# Altium PCB 矿用数显表20121017.PcbDoc (part 2 of 2)
Units mil, origin at the board's own origin, x right, y up, seen from the top; angles counter-clockwise.
Board outline 6550 x 5130 mil, 2 copper layers (Top Layer, Bottom Layer); 91 components, 70 nets, 283 pads, 64 vias.
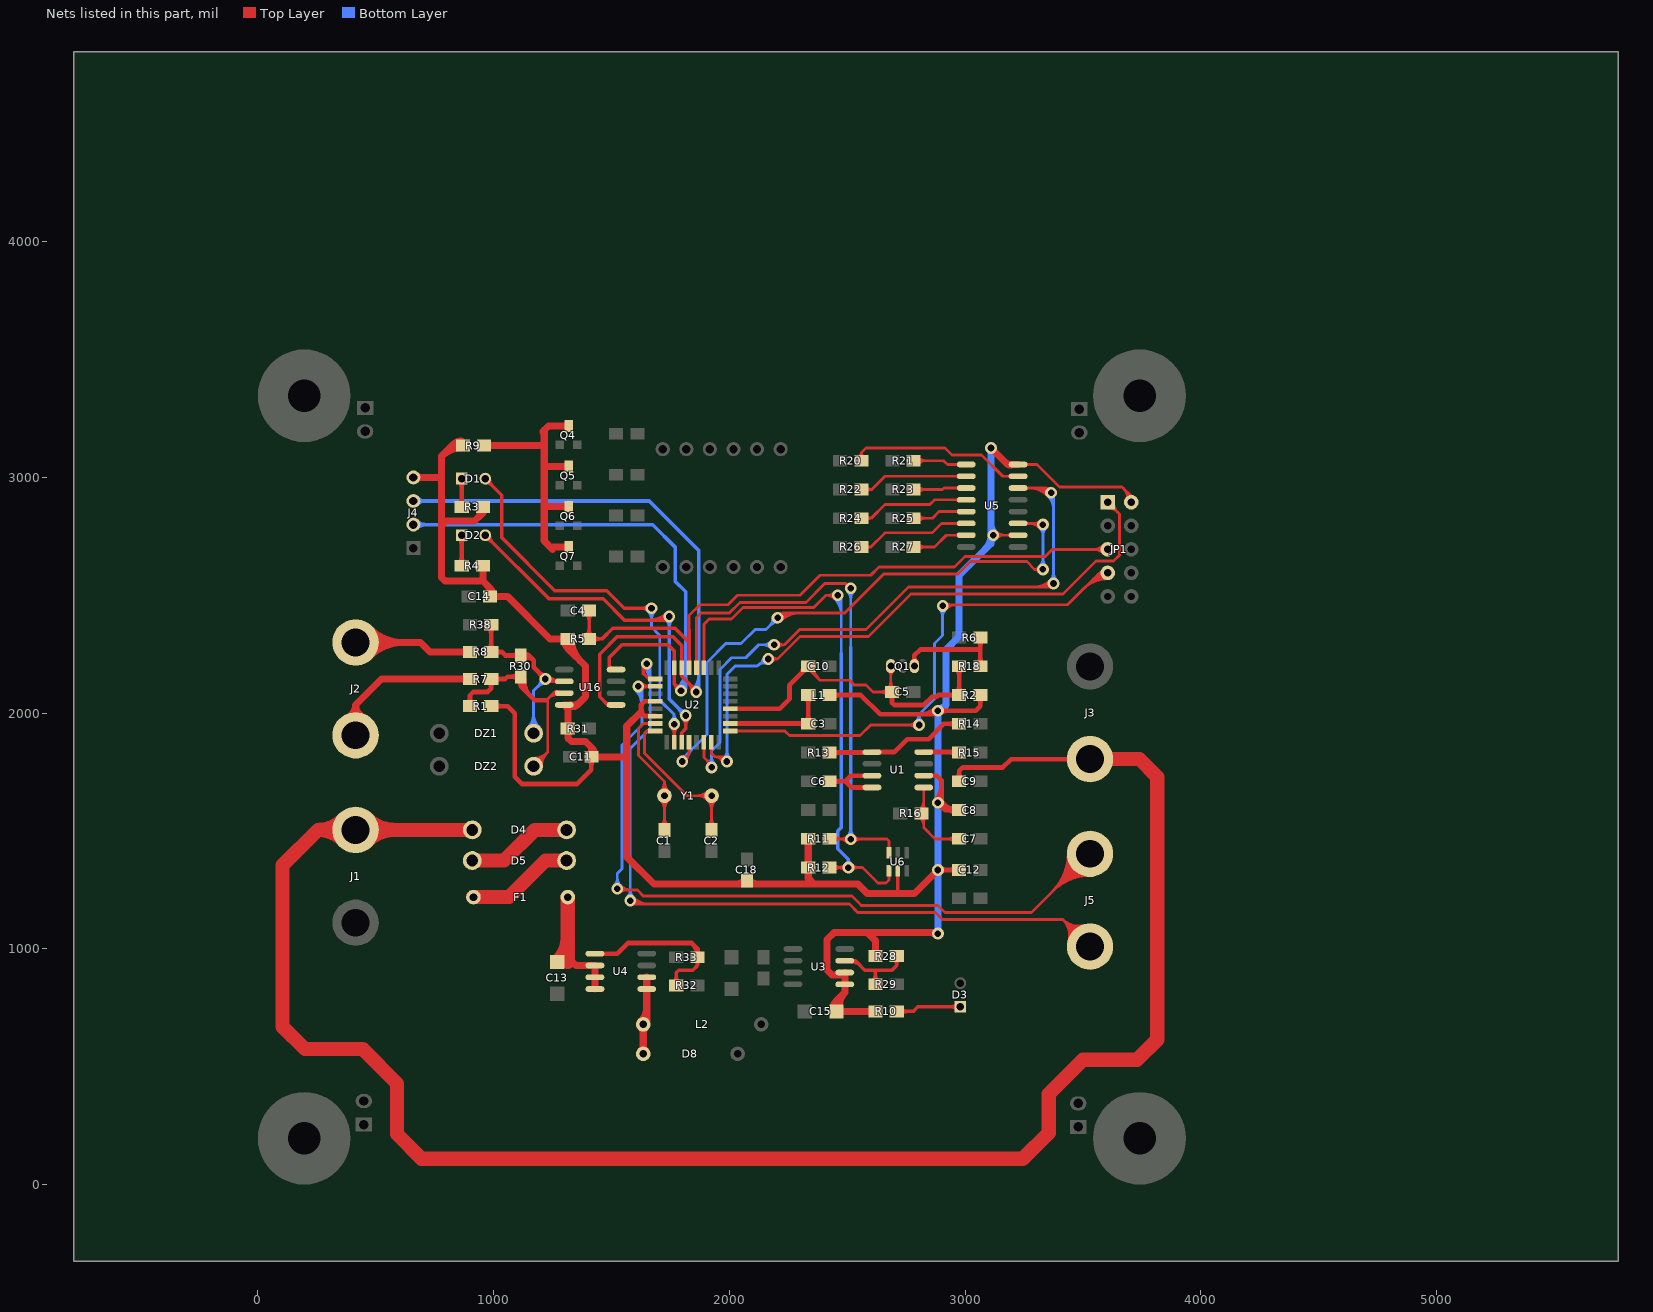
[diagram p2: the nets of this part, all layers, seen from the top]

## Via types
v1: diameter 50, hole 28, Top Layer to Bottom Layer, 64 vias

## Nets (pads, with @x,y where several pads share a name; then routed paths per layer and width w, separated by ;. In a path a pad name is that pad's centre, name@x,y a point inside that pad or via, vN(x,y) a via of type N, cw(c..) or ccw(c..) an arc to the next point about the centre after c; other vN are vias at no path point) (continued)
MOSI: JP1.1 U2.15 | length 3099.7
  Top Layer w12: U2.15@1923.74,1876.54 1923.74,1831.26 1940,1815 ; 1955.39,1815 cw(c1955.39,1786.31) v1@1983.21,1793.3 ; 1970.77,1815 cw(c1970.77,1790.17) v1@1994.85,1796.22 ; v1@1971.57,1790.37 ccw(c1940,1782.45) 1940,1815 ; v1@1972.48,1802.36 ccw(c1961.83,1806.83) 1970,1815 ; v1@1982.64,1812.52 cw(c1978.17,1823.17) 1970,1815 ; v1(1990,1795) 1970,1815 ; v1(2165,2230) 2205,2230 ; v1@2179.73,2218 cw(c2205,2197.4) 2205,2230 ; v1@2179.73,2242 ccw(c2205,2262.6) 2205,2230 ; JP1.1@3605,2870 cw(c3605,2809.64) 3647.68,2852.32 cw(c3690.36,2895) JP1.1@3630,2895 ; JP1.1@3605,2882 cw(c3605,2850.62) 3627.19,2872.81 cw(c3649.38,2895) JP1.1@3618,2895 ; JP1.1@3605,2895 3655,2845 3655,2670 3630,2645 3555,2645 3415,2505 2770,2505 2590,2325 2300,2325 2205,2230 ; 1940,1815 1970,1815
  Bottom Layer w12: v1@1976.56,1808.44 ccw(c1944.13,1840.87) 1990,1840.87 ccw(c2035.87,1840.87) v1@2003.44,1808.44 ; v1(1990,1795) 1990,2165 2025,2200 2115,2200 v1(2165,2230) ; v1@2146.57,2234.61 cw(c2102.07,2245.73) 2125.67,2206.4 cw(c2149.27,2167.07) v1@2160.39,2211.57
NetC1_2: C1.2 U2.7 Y1.2 | length 914.9
  Top Layer w12: U2.7@1686.54,1956.26 1636.26,1956.26 1615,1935 1615,1820 1725,1710 ; Y1.2@1707.32,1632.32 cw(c1664.64,1589.64) 1725,1589.64 cw(c1785.36,1589.64) Y1.2@1742.68,1632.32 ; Y1.2@1707.4,1667.75 ccw(c1665.51,1710) 1725,1710 ; C1.2@1711.56,1523.44 ccw(c1679.13,1555.87) 1725,1555.87 ccw(c1770.87,1555.87) C1.2@1738.44,1523.44 ; Y1.2@1715.81,1640.81 cw(c1693.62,1618.62) 1725,1618.62 cw(c1756.38,1618.62) Y1.2@1734.19,1640.81 ; Y1.2@1715.85,1659.23 ccw(c1694.06,1681.2) 1725,1681.2 ccw(c1755.94,1681.2) Y1.2@1734.15,1659.23 ; C1.2@1725,1505 Y1.2@1725,1650 1725,1710 ; Y1.2@1742.6,1667.75 cw(c1784.49,1710) 1725,1710
NetC2_2: C2.2 U2.8 Y1.1 | length 1000.4
  Top Layer w12: U2.8@1686.54,1924.76 1649.76,1924.76 1640,1915 1640,1830 1820,1650 Y1.1@1925,1650 C2.2@1925,1505 ; Y1.1@1907.32,1667.68 cw(c1864.64,1710.36) 1864.64,1650 cw(c1864.64,1589.64) 1907.32,1632.32 cw(c1864.64,1589.64) 1925,1589.64 cw(c1985.36,1589.64) Y1.1@1942.68,1632.32 ; C2.2@1911.56,1523.44 ccw(c1879.13,1555.87) 1925,1555.87 ccw(c1970.87,1555.87) C2.2@1938.44,1523.44 ; Y1.1@1915.81,1659.19 cw(c1893.62,1681.38) 1893.62,1650 cw(c1893.62,1618.62) 1915.81,1640.81 cw(c1893.62,1618.62) 1925,1618.62 cw(c1956.38,1618.62) Y1.1@1934.19,1640.81
NetC3_1: C3.1 L1.1 U2.18 | length 622.2
  Top Layer w20: U2.18@2003.46,1956.26 2333.74,1956.26 2335,1957.52 L1.1@2335,2077 ; 2290.74,1956.26 cw(c2290.74,1915.74) C3.1@2319.39,1944.39 ; 2296.83,1956.26 ccw(c2296.83,1988.17) C3.1@2319.39,1965.61 ; C3.1@2324.39,1965.61 ccw(c2298.79,1991.21) 2335,1991.21 ccw(c2371.21,1991.21) C3.1@2345.61,1965.61 ; L1.1@2324.39,2066.39 cw(c2298.79,2040.79) 2335,2040.79 cw(c2371.21,2040.79) L1.1@2345.61,2066.39
NetC5_1: C5.1 C10.1 Q1.3 R2.1 R18.1 U2.20 | length 2005.2
  Top Layer w12: C10.1@2335,2199 2335,2190 2385,2140 2510,2140 2530,2120 2580,2120 2610,2090 C5.1@2690,2090 2685,2095 Q1.3@2685,2200 ; C10.1@2346.98,2198.53 ccw(c2389.31,2195.68) 2359.31,2165.69 ; C10.1@2358.96,2197.72 ccw(c2424.32,2193.33) 2378,2147 ; C5.1@2671.56,2076.56 ccw(c2639.13,2044.13) 2639.13,2090 ccw(c2639.13,2135.87) 2671.56,2103.44 ccw(c2639.13,2135.87) 2685,2135.87 ccw(c2730.87,2135.87) C5.1@2698.44,2103.44 ; Q1.3@2675.1,2180.1 cw(c2651.2,2156.2) 2685,2156.2 cw(c2718.8,2156.2) Q1.3@2694.9,2180.1
  Top Layer w20: U2.20@2003.46,2019.25 2214.25,2019.25 2255,2060 2255,2119 C10.1@2335,2199 ; 2300.86,2164.86 ccw(c2266.72,2199) C10.1@2315,2199 ; C10.1@2312.93,2176.93 cw(c2330,2159.86) C10.1@2330,2184 ; C5.1@2679.39,2079.39 cw(c2653.79,2053.79) 2690,2053.79 cw(c2726.21,2053.79) C5.1@2700.61,2079.39 ; C5.1@2690,2090 2690,2045 2700,2035 2825,2035 2860,2070 2880,2070 2887,2077 R2.1@2975,2077 R18.1@2975,2199 ; R2.1@2959.39,2066.39 ccw(c2933.79,2040.79) 2933.79,2077 ccw(c2933.79,2113.21) R2.1@2959.39,2087.61 ; R2.1@2964.39,2087.61 ccw(c2938.79,2113.21) 2975,2113.21 ccw(c3011.21,2113.21) R2.1@2985.61,2087.61 ; R18.1@2964.39,2188.39 cw(c2938.79,2162.79) 2975,2162.79 cw(c3011.21,2162.79) R18.1@2985.61,2188.39
NetC6_1: C6.1 U1.3 U1.4 | length 371.6
  Top Layer w20: C6.1@2425,1711 2491,1711 ; C6.1@2440.61,1700.39 cw(c2466.21,1674.79) 2466.21,1711 cw(c2466.21,1747.21) C6.1@2440.61,1721.61 ; U1.4@2605,1685 2517,1685 2491,1711 ; U1.3@2605,1735 2515,1735 2491,1711
NetC13_1: C13.1 F1.1 U4.2 U4.3 U4.4 | length 794.3
  Top Layer w30: 1315,945 1335,945 1350,930 U4.2@1430,930 U4.4@1430,830 ; 1306.21,945 ccw(c1306.21,908.79) 1280.61,934.39 cw(c1306.21,908.79) 1306.21,945 ; 1306.21,945 cw(c1306.21,981.21) 1280.61,955.61 ccw(c1306.21,981.21) 1306.21,945
  Top Layer w60: 1315,945 F1.1@1315,1220 ; 1315,990 C13.1@1270,945 ccw(c1161.36,1053.64) 1315,1053.64
NetD1_1: D1.1 R3.1 | length 233.8
  Top Layer w20: R3.1@854.39,2885.61 ccw(c828.79,2911.21) 865,2911.21 ccw(c901.21,2911.21) R3.1@875.61,2885.61 ; D1.1@854.39,2984.39 cw(c828.79,2958.79) 865,2958.79 cw(c901.21,2958.79) D1.1@875.61,2984.39 ; R3.1@865,2875 D1.1@865,2995
NetD1_2: D1.2 U2.10 | length 1975.6
  Top Layer w15: D1.2@965,2977.5 cw(c965,2935.25) 994.87,2965.13 cw(c1024.75,2995) D1.2@982.5,2995 ; D1.2@965,2995 1035,2925 1035,2745 1260,2520 1480,2520 1555,2445 v1(1670,2445) ; v1@1657.63,2432.63 ccw(c1627.75,2402.75) 1627.75,2445 ccw(c1627.75,2487.25) v1@1657.63,2457.37 ; v1@1753.89,1941.37 cw(c1724.01,1911.49) 1766.26,1911.49 cw(c1808.51,1911.49) v1@1778.63,1941.37 ; U2.10@1766.26,1876.54 v1(1766.26,1953.74)
  Bottom Layer w12: v1@1656.56,2431.56 cw(c1624.13,2399.13) 1670,2399.13 cw(c1715.87,2399.13) v1@1683.44,2431.56 ; v1(1670,2445) 1670,2365 1705,2330 1705,2055 1766.26,1993.74 ; v1@1754.26,1968.47 ccw(c1733.66,1993.74) 1766.26,1993.74 ; v1(1766.26,1953.74) 1766.26,1993.74 ; v1@1778.26,1968.47 cw(c1798.86,1993.74) 1766.26,1993.74
NetD2_1: D2.1 R4.1 | length 243.8
  Top Layer w20: R4.1@854.39,2635.61 ccw(c828.79,2661.21) 865,2661.21 ccw(c901.21,2661.21) R4.1@875.61,2635.61 ; D2.1@854.39,2744.39 cw(c828.79,2718.79) 865,2718.79 cw(c901.21,2718.79) D2.1@875.61,2744.39 ; R4.1@865,2625 D2.1@865,2755
NetD2_2: D2.2 U2.11 | length 1888.8
  Top Layer w15: D2.2@965,2737.5 cw(c965,2695.25) 994.87,2725.13 cw(c1024.75,2755) D2.2@982.5,2755 ; D2.2@965,2755 1235,2485 1465,2485 1555,2395 1730,2395 v1(1745,2410) ; 1666.54,2395 ccw(c1666.54,2488.46) v1@1732.63,2422.37 ; 1702.75,2395 ccw(c1702.75,2452.25) v1@1743.23,2411.77 ; U2.11@1797.76,1876.54 1797.76,1917.76 1815,1935 v1(1815,1990) ; v1@1802.63,1977.63 cw(c1772.75,1947.75) 1815,1947.75 cw(c1857.25,1947.75) v1@1827.37,1977.63
  Bottom Layer w15: v1@1732.63,2397.63 cw(c1702.75,2367.75) 1745,2367.75 cw(c1787.25,2367.75) v1@1757.37,2397.63 ; v1(1745,2410) 1745,2060 v1(1815,1990) ; v1@1797.5,1990 ccw(c1755.25,1990) 1785.13,2019.87 ccw(c1815,2049.75) v1@1815,2007.5
NetD3_1: D3.1 R10.1 | length 411
  Top Layer w15: R10.1@2710,735 2780,735 2800,755 D3.1@2980,755 ; R10.1@2727.37,722.63 cw(c2757.25,692.75) 2757.25,735 cw(c2757.25,777.25) R10.1@2727.37,747.37 ; D3.1@2967.63,742.63 ccw(c2937.75,712.75) 2937.75,755 ccw(c2937.75,797.25) D3.1@2967.63,767.37
NetD4_2: D4.2 D5.1 | length 453.8
  Top Layer w60: D5.1@910,1375 1045,1375 1175,1505 D4.2@1310,1505
NetD5_2: D5.2 F1.2 | length 459.2
  Top Layer w60: F1.2@915,1220 1065,1220 1220,1375 D5.2@1310,1375
NetD8_2: D8.2 L2.1 U4.5 U4.6 | length 523.1
  Top Layer w30: D8.2@1623.69,566.31 ccw(c1596.37,593.63) 1635,593.63 ccw(c1673.63,593.63) D8.2@1646.31,566.31 ; L2.1@1623.69,668.69 cw(c1596.37,641.37) 1635,641.37 cw(c1673.63,641.37) L2.1@1646.31,668.69 ; L2.1@1623.69,691.31 ccw(c1560.16,754.84) 1650,754.84 ; D8.2@1635,555 L2.1@1635,680 1650,695 U4.6@1650,880
NetDZ1_2: DZ1.2 R8.2 R30.2 R38.2 U16.6 | length 1726.2
  Top Layer w12: v1@1201.38,2148.79 ccw(c1178.46,2153.46) 1195,2170 ; v1@1216.21,2163.62 cw(c1211.54,2186.54) 1195,2170 ; v1@1224.95,2149.95 ccw(c1261.04,2186.04) U16.6@1261.04,2135 ; v1@1233.44,2158.44 ccw(c1290.01,2215.01) U16.6@1290.01,2135 ; U16.6@1267.76,2130.76 ccw(c1257.51,2120.51) 1257.51,2135 ccw(c1257.51,2149.49) U16.6@1267.76,2139.24 ; U16.6@1300,2135 1230,2135 1195,2170
  Top Layer w20: R8.2@979.39,2270.61 ccw(c953.79,2296.21) 990,2296.21 ccw(c1026.21,2296.21) R8.2@1000.61,2270.61 ; R38.2@979.39,2364.39 cw(c953.79,2338.79) 990,2338.79 cw(c1026.21,2338.79) R38.2@1000.61,2364.39 ; R38.2@990,2375 R8.2@990,2260 1035,2260 1050,2245 1150,2245 ; R8.2@1005.61,2249.39 cw(c1031.21,2223.79) 1031.21,2260 cw(c1031.21,2296.21) R8.2@1005.61,2270.61 ; R30.2@1104.39,2234.39 ccw(c1078.79,2208.79) 1078.79,2245 ccw(c1078.79,2281.21) R30.2@1104.39,2255.61 ; R30.2@1111.97,2243.98 cw(c1131.29,2218.64) 1153.83,2241.17 ; R30.2@1113.86,2244.87 cw(c1126.24,2192.06) 1164.59,2230.41 ; R30.2@1124.1,2228.07 cw(c1145.29,2200.29) 1170,2225 ; R30.2@1125.86,2234.66 cw(c1150,2211.67) 1150,2245 ; R30.2@1125.86,2255.34 ccw(c1150,2278.33) 1150,2245 ; v1@1205,2145 ccw(c1168.79,2145) 1194.39,2170.61 ccw(c1220,2196.21) v1@1220,2160 ; v1(1220,2145) 1170,2195 1170,2225 ; 1150,2245 1170,2225
  Bottom Layer w12: DZ1.2@1145.96,1939.04 ccw(c1087.92,1997.08) 1170,1997.08 ccw(c1252.08,1997.08) DZ1.2@1194.04,1939.04 ; DZ1.2@1154.44,1930.56 ccw(c1116.89,1968.11) 1170,1968.11 ccw(c1223.11,1968.11) DZ1.2@1185.56,1930.56 ; DZ1.2@1170,1915 1170,2095 v1(1220,2145) ; v1@1201,2145 cw(c1155.13,2145) 1187.56,2112.56 cw(c1220,2080.13) v1@1220,2126
NetDZ2_2: DZ2.2 R1.1 R7.2 R30.1 U16.7 | length 1702.8
  Top Layer w12: DZ2.2@1170,1775 1230,1835 1230,2060 ; DZ2.2@1170,1797 ccw(c1170,1850.11) 1207.56,1812.56 ccw(c1245.11,1775) DZ2.2@1192,1775 ; DZ2.2@1170,1809 ccw(c1170,1891.08) 1228.04,1833.04 ccw(c1286.08,1775) DZ2.2@1204,1775 ; 1225,2055 1255,2085 U16.7@1300,2085 ; 1232.74,2062.74 cw(c1272,2023.47) U16.7@1272,2079 ; 1246.5,2076.5 cw(c1259.97,2063.03) U16.7@1269.12,2079.74 ; 1253.22,2083.22 cw(c1272,2064.44) U16.7@1272,2091 ; 1257.82,2087.82 cw(c1267.98,2077.66) U16.7@1274.88,2090.26 ; U16.7@1267.76,2080.76 ccw(c1257.51,2070.51) 1257.51,2085 ccw(c1257.51,2099.49) U16.7@1267.76,2089.24
  Top Layer w20: R1.1@889.39,2040.61 ccw(c863.79,2066.21) 900,2066.21 ccw(c936.21,2066.21) R1.1@910.61,2040.61 ; R1.1@900,2030 900,2075 915,2090 975,2090 990,2105 R7.2@990,2145 1050,2145 1060,2155 R30.1@1115,2155 1115,2115 ; R7.2@979.39,2134.39 cw(c953.79,2108.79) 990,2108.79 cw(c1026.21,2108.79) R7.2@1000.61,2134.39 ; R7.2@1005.61,2134.39 cw(c1031.21,2108.79) 1031.21,2145 cw(c1031.21,2181.21) R7.2@1005.61,2155.61 ; R30.1@1104.39,2144.39 ccw(c1078.79,2118.79) 1078.79,2155 ccw(c1078.79,2191.21) R30.1@1104.39,2165.61 ; R30.1@1110.02,2150.45 ccw(c1169.64,2145.02) 1127.31,2102.69 ; R30.1@1129.94,2148.64 ccw(c1224.98,2139.99) 1157.5,2072.5 ; 1225,2055 1175,2055 1115,2115 ; 1115,2115 ccw(c1081.67,2115) 1104.66,2139.14 cw(c1081.67,2115) 1115,2115 ; 1115,2115 cw(c1148.33,2115) 1125.34,2139.14 ccw(c1148.33,2115) 1115,2115
NetQ1_1: Q1.1 R6.2 R18.2 | length 609
  Top Layer w20: Q1.1@2777.93,2217.07 ccw(c2760.86,2234.14) 2785,2234.14 ccw(c2809.14,2234.14) Q1.1@2792.07,2217.07 ; Q1.1@2785,2200 2785,2245 2810,2270 3065,2270 ; R18.2@3054.39,2209.61 ccw(c3028.79,2235.21) 3065,2235.21 ccw(c3101.21,2235.21) R18.2@3075.61,2209.61 ; R6.2@3054.39,2310.39 cw(c3028.79,2284.79) 3065,2284.79 cw(c3101.21,2284.79) R6.2@3075.61,2310.39 ; R18.2@3065,2199 R6.2@3065,2321
NetQ4_3: Q4.3 Q5.3 Q6.3 Q7.3 R9.2 | length 1184.3
  Top Layer w30: R9.2@960,3135 1215,3135 ; 1210,3190 1210,3195 1233,3218 Q4.3@1318,3218 ; 1215,2882 1221,2876 Q6.3@1318,2876 ; 1215,3045 1217,3047 Q5.3@1318,3047 ; 1215,3200 1215,2730 1250,2695 ; 1240,2705 Q7.3@1318,2705
NetR13_2: R13.2 R14.1 U1.1 | length 711.5
  Top Layer w20: R13.2@2425,1833 U1.1@2603,1833 ; R13.2@2440.61,1822.39 cw(c2466.21,1796.79) 2466.21,1833 cw(c2466.21,1869.21) R13.2@2440.61,1843.61 ; U1.1@2605,1835 2700,1835 2755,1890 2845,1890 2910,1955 R14.1@2975,1955 ; R14.1@2959.39,1944.39 ccw(c2933.79,1918.79) 2933.79,1955 ccw(c2933.79,1991.21) R14.1@2959.39,1965.61
NetR15_1: R15.1 U1.8 | length 207.7
  Top Layer w20: U1.8@2825,1835 2973,1835 R15.1@2975,1833 ; 2928.96,1835 cw(c2928.96,1791.96) R15.1@2959.39,1822.39 ; 2938.62,1835 ccw(c2938.62,1864.38) R15.1@2959.39,1843.61
NetR20_1: R20.1 U5.15 | length 822.4
  Top Layer w12: R20.1@2550.04,3087.18 ccw(c2539.08,3105) 2560,3105 ; R20.1@2560,3071 2560,3105 ; R20.1@2569.96,3087.18 cw(c2580.92,3105) 2560,3105 ; U5.15@3192.76,3000.76 ccw(c3182.51,2990.51) 3182.51,3005 ccw(c3182.51,3019.49) U5.15@3192.76,3009.24 ; U5.15@3225,3005 3160,3005 3070,3095 2945,3095 2915,3125 2580,3125 2560,3105
NetR21_1: R21.1 U5.1 | length 324.4
  Top Layer w12: R21.1@2782,3071 2909,3071 2925,3055 U5.1@3005,3055 ; R21.1@2800.44,3057.56 cw(c2832.87,3025.13) 2832.87,3071 cw(c2832.87,3116.87) R21.1@2800.44,3084.44 ; U5.1@2972.76,3050.76 ccw(c2962.51,3040.51) 2962.51,3055 ccw(c2962.51,3069.49) U5.1@2972.76,3059.24
NetR22_1: R22.1 U5.2 | length 546.3
  Top Layer w12: R22.1@2560,2949 2604,2949 ; R22.1@2579.96,2937.29 cw(c2604,2918.48) 2604,2949 ; R22.1@2579.96,2960.71 ccw(c2604,2979.52) 2604,2949 ; U5.2@2972.76,3000.76 ccw(c2962.51,2990.51) 2962.51,3005 ccw(c2962.51,3019.49) U5.2@2972.76,3009.24 ; U5.2@3005,3005 2660,3005 2604,2949
NetR23_1: R23.1 U5.3 | length 320.3
  Top Layer w12: R23.1@2782,2949 2904,2949 2910,2955 U5.3@3005,2955 ; R23.1@2800.44,2935.56 cw(c2832.87,2903.13) 2832.87,2949 cw(c2832.87,2994.87) R23.1@2800.44,2962.44 ; U5.3@2972.76,2950.76 ccw(c2962.51,2940.51) 2962.51,2955 ccw(c2962.51,2969.49) U5.3@2972.76,2959.24
NetR24_1: R24.1 U5.4 | length 550.4
  Top Layer w12: R24.1@2560,2827 2602,2827 ; R24.1@2580.44,2815.93 cw(c2602,2800.48) 2602,2827 ; R24.1@2580.44,2838.07 ccw(c2602,2853.52) 2602,2827 ; U5.4@2972.76,2900.76 ccw(c2962.51,2890.51) 2962.51,2905 ccw(c2962.51,2919.49) U5.4@2972.76,2909.24 ; U5.4@3005,2905 2870,2905 2850,2885 2660,2885 2602,2827
NetR25_1: R25.1 U5.5 | length 329.4
  Top Layer w12: R25.1@2782,2827 2862,2827 2890,2855 U5.5@3005,2855 ; R25.1@2800.44,2813.56 cw(c2832.87,2781.13) 2832.87,2827 cw(c2832.87,2872.87) R25.1@2800.44,2840.44 ; U5.5@2972.76,2850.76 ccw(c2962.51,2840.51) 2962.51,2855 ccw(c2962.51,2869.49) U5.5@2972.76,2859.24
NetR26_1: R26.1 U5.6 | length 554.4
  Top Layer w12: R26.1@2560,2705 2600,2705 ; R26.1@2580.93,2694.65 cw(c2600,2682.27) 2600,2705 ; R26.1@2580.93,2715.35 ccw(c2600,2727.73) 2600,2705 ; U5.6@2972.76,2800.76 ccw(c2962.51,2790.51) 2962.51,2805 ccw(c2962.51,2819.49) U5.6@2972.76,2809.24 ; U5.6@3005,2805 2900,2805 2860,2765 2660,2765 2600,2705
NetR27_1: R27.1 U5.7 | length 338.5
  Top Layer w12: R27.1@2782,2705 2870,2705 2920,2755 U5.7@3005,2755 ; R27.1@2800.44,2691.56 cw(c2832.87,2659.13) 2832.87,2705 cw(c2832.87,2750.87) R27.1@2800.44,2718.44 ; U5.7@2972.76,2750.76 ccw(c2962.51,2740.51) 2962.51,2755 ccw(c2962.51,2769.49) U5.7@2972.76,2759.24
NetR28_1: R28.1 R29.1 U3.7 | length 538.5
  Top Layer w15: U3.7@2490,950 2535,950 2575,910 2690,910 2710,930 ; U3.7@2518,945.5 cw(c2518,893.59) 2554.7,930.3 ; U3.7@2519.83,945.89 cw(c2528.47,926.47) 2543.5,941.5 ; R29.1@2607.63,862.37 ccw(c2577.75,892.25) 2620,892.25 ccw(c2662.25,892.25) R29.1@2632.37,862.37 ; R29.1@2620,850 2620,910 ; R28.1@2698.12,957.15 cw(c2673.04,930) 2710,930 ; R28.1@2710,970 2710,930 ; R28.1@2721.88,957.15 ccw(c2746.96,930) 2710,930
NetR32_1: R32.1 R33.2 U4.1 | length 918.4
  Top Layer w15: R32.1@1762.63,857.37 ccw(c1732.75,887.25) 1775,887.25 ccw(c1817.25,887.25) R32.1@1787.37,857.37 ; R32.1@1775,845 1775,900 1785,910 1845,910 1865,930 ; R33.2@1854.5,951 cw(c1838.75,930) 1865,930 ; R33.2@1865,965 1865,930 ; R33.2@1875.5,951 ccw(c1891.25,930) 1865,930
  Top Layer w20: U4.1@1430,980 1525,980 1570,1025 1840,1025 1865,1000 ; 1847.72,1017.27 cw(c1804.32,973.87) R33.2@1864.94,964.21 ; R33.2@1854.66,975.86 ccw(c1831.67,1000) 1865,1000 ; R33.2@1865,965 1865,1000 ; R33.2@1875.34,975.86 cw(c1898.33,1000) 1865,1000
OUT0-5V: C7.1 R16.2 U1.5 | length 632.2
  Top Layer w12: R16.2@2806.56,1561.56 cw(c2762.06,1517.06) 2825,1517.06 ; R16.2@2806.56,1588.44 ccw(c2762.06,1632.94) 2825,1632.94 ; R16.2@2815.05,1570.05 cw(c2791.03,1546.03) 2825,1546.03 ; R16.2@2815.05,1579.95 ccw(c2791.03,1603.97) 2825,1603.97 ; U1.5@2820.76,1680.76 cw(c2810.51,1670.51) 2825,1670.51 cw(c2839.49,1670.51) U1.5@2829.24,1680.76 ; 2825,1541.2 cw(c2853.8,1541.2) R16.2@2833.44,1561.56 ; 2825,1608.8 ccw(c2853.8,1608.8) R16.2@2833.44,1588.44 ; U1.5@2825,1685 2825,1515 2873,1467 C7.1@2975,1467 ; C7.1@2956.56,1453.56 ccw(c2924.13,1421.13) 2924.13,1467 ccw(c2924.13,1512.87) C7.1@2956.56,1480.44
RST: C4.1 JP1.5 R5.1 U2.29 | length 3043.5
  Top Layer w12: 1829.25,2354.25 1829.25,2414.25 1875,2460 1995,2460 2035,2500 2300,2500 2385,2585 2600,2585 2635,2620 2955,2620 3000,2665 3340,2665 3370,2695 JP1.5@3605,2695 ; JP1.5@3587.32,2677.32 ccw(c3544.64,2634.64) 3544.64,2695 ccw(c3544.64,2755.36) JP1.5@3587.32,2712.68 ; JP1.5@3595.81,2685.81 ccw(c3573.62,2663.62) 3573.62,2695 ccw(c3573.62,2726.38) JP1.5@3595.81,2704.19
  Top Layer w15: R5.1@1392.63,2327.37 ccw(c1362.75,2357.25) 1405,2357.25 ccw(c1447.25,2357.25) R5.1@1417.37,2327.37 ; C4.1@1392.63,2422.63 cw(c1362.75,2392.75) 1405,2392.75 cw(c1447.25,2392.75) C4.1@1417.37,2422.63 ; C4.1@1405,2435 R5.1@1405,2315 1460,2315 1505,2360 1770,2360 1829.25,2300.75 ; R5.1@1422.37,2302.63 cw(c1452.25,2272.75) 1452.25,2315 cw(c1452.25,2357.25) R5.1@1422.37,2327.37 ; U2.29@1829.25,2193.46 1829.25,2354.25
RXD: J4.3 U2.30 U16.1 | length 3046.4
  Top Layer w15: 1472.37,2047.63 ccw(c1492,2067.26) U16.1@1492,2039.5 ; U16.1@1520,2035 1485,2035 1450,2070 1450,2250 1525,2325 1760,2325 1797.76,2287.24 1797.76,2157.24 1860,2095 v1(1860,2090) ; 1826.59,2128.41 cw(c1788.18,2090) v1@1842.5,2090 ; 1838.66,2116.34 ccw(c1860,2137.68) v1@1860,2107.5
  Bottom Layer w15: J4.3@660,2900 1660,2900 1870,2690 1870,2100 v1(1860,2090) ; J4.3@675.58,2884.42 cw(c713.18,2846.82) 713.18,2900 cw(c713.18,2953.18) J4.3@675.58,2915.58 ; v1@1847.63,2102.37 ccw(c1793.61,2156.39) 1870,2156.39 ; v1@1858.23,2091.77 ccw(c1829.82,2120.18) 1870,2120.18
SCK: JP1.7 U2.17 | length 2793.9
  Top Layer w12: U2.17@2003.46,1924.76 2235.24,1924.76 2255,1905 2555,1905 2600,1950 v1(2805,1950) ; v1@2791.56,1936.56 ccw(c2759.13,1904.13) 2759.13,1950 ccw(c2759.13,1995.87) v1@2791.56,1963.44 ; v1(2905,2455) 2910,2460 3435,2460 3570,2595 ; v1@2909.95,2450.05 cw(c2933.97,2426.03) 2933.97,2460 ; v1@2918.44,2441.56 cw(c2962.94,2397.06) 2962.94,2460 ; v1@2918.44,2468.44 ccw(c2938.8,2488.8) 2938.8,2460 ; 3502.57,2527.57 cw(c3605,2425.15) JP1.7@3605,2570 ; 3523.06,2548.06 cw(c3605,2466.12) JP1.7@3605,2582 ; 3543.54,2568.54 cw(c3605,2507.09) JP1.7@3605,2594 ; 3564.03,2589.03 cw(c3605,2548.06) JP1.7@3605,2606 ; JP1.7@3581.35,2586.89 ccw(c3570,2583) 3570,2595 ; JP1.7@3581.35,2603.11 cw(c3570,2607) 3570,2595 ; JP1.7@3605,2595 3570,2595
  Bottom Layer w12: v1@2791.75,1963.62 ccw(c2761.22,1995) 2805,1995 ; v1(2805,1950) 2805,1995 ; v1@2818.25,1963.62 cw(c2848.78,1995) 2805,1995 ; v1@2891.56,2441.56 cw(c2859.13,2409.13) 2905,2409.13 cw(c2950.87,2409.13) v1@2918.44,2441.56 ; v1(2905,2455) 2905,2330 2870,2295 2870,2060 2805,1995
SCL: R11.1 U2.28 U6.3 | length 2695.5
  Top Layer w12: U2.28@1860.75,2193.46 1860.75,2405.75 1880,2425 2000,2425 2045,2470 2325,2470 2405,2550 2495,2550 ; R11.1@2425,1467 2668,1467 2677.6,1457.4 U6.3@2677.6,1408.39 ; R11.1@2443.44,1453.56 cw(c2475.87,1421.13) 2475.87,1467 cw(c2475.87,1512.87) R11.1@2443.44,1480.44 ; 2464.3,1467 cw(c2464.3,1414.3) v1@2501.56,1451.56 ; 2473.96,1467 ccw(c2473.96,1506.04) v1@2501.56,1478.44 ; v1@2497.48,2537.36 ccw(c2486.83,2541.83) 2495,2550 ; v1@2507.64,2547.52 cw(c2503.17,2558.17) 2495,2550 ; v1(2515,2530) 2495,2550 ; v1@2528.44,1451.56 cw(c2565.7,1414.3) 2565.7,1467 ; v1@2528.44,1478.44 ccw(c2556.04,1506.04) 2556.04,1467 ; U6.3@2674.45,1425.95 ccw(c2666.84,1433.55) 2677.6,1433.55
  Bottom Layer w12: v1@2501.56,2516.56 cw(c2469.13,2484.13) 2515,2484.13 cw(c2560.87,2484.13) v1@2528.44,2516.56 ; 2515,2280 v1(2515,2530)
  Bottom Layer w15: v1@2502.63,1477.37 ccw(c2472.75,1507.25) 2515,1507.25 ccw(c2557.25,1507.25) v1@2527.37,1477.37 ; v1(2515,1465) 2515,2280
SCLK: U2.12 U5.11 | length 3246.6
  Top Layer w12: v1(1800,1795) 1829.25,1824.25 ; v1@1801.44,1813.95 ccw(c1804.13,1849.38) 1829.25,1824.25 ; v1@1818.95,1796.44 cw(c1854.38,1799.13) 1829.25,1824.25 ; U2.12@1829.25,1876.54 1829.25,1824.25 ; v1@2201.46,2408.54 cw(c2241.21,2368.79) 2241.21,2425 ; v1(2205,2405) 2225,2425 ; v1@2209.95,2400.05 cw(c2270.18,2339.82) 2270.18,2425 ; v1@2212.36,2422.52 ccw(c2216.83,2433.17) 2225,2425 ; v1@2218.44,2391.56 cw(c2299.15,2310.85) 2299.15,2425 ; v1@2222.52,2412.36 cw(c2233.17,2416.83) 2225,2425 ; U5.11@3225,2805 3325,2805 v1(3330,2800) ; U5.11@3257.24,2800.76 cw(c3267.49,2790.51) 3267.49,2805 cw(c3267.49,2819.49) U5.11@3257.24,2809.24 ; 3272.06,2805 cw(c3272.06,2742.06) v1@3316.56,2786.56 ; 3296.2,2805 ccw(c3296.2,2833.8) v1@3316.56,2813.44 ; 3301.03,2805 cw(c3301.03,2771.03) v1@3325.05,2795.05 ; v1@3314.07,2599.65 ccw(c3295,2587.27) 3295,2610 ; v1@3314.07,2620.35 cw(c3295,2632.73) 3295,2610 ; v1(3330,2610) 3295,2610 ; 2225,2425 2490,2425 2655,2590 2970,2590 3023,2643 3262,2643 3295,2610
  Bottom Layer w12: v1(1800,1795) 1800,1805 1905,1910 1905,2215 1985,2295 2050,2295 2110,2355 2155,2355 v1(2205,2405) ; v1@1800,1814 ccw(c1800,1835.73) 1815.36,1820.36 ; v1@1807,1795 cw(c1848.04,1795) 1819.02,1824.02 ; v1@1819,1795 cw(c1889.01,1795) 1839.51,1844.51 ; v1@2186,2405 cw(c2140.13,2405) 2172.56,2372.56 cw(c2205,2340.13) v1@2205,2386 ; v1@3316.56,2623.44 ccw(c3284.13,2655.87) 3330,2655.87 ccw(c3375.87,2655.87) v1@3343.44,2623.44 ; v1@3316.56,2786.56 cw(c3284.13,2754.13) 3330,2754.13 cw(c3375.87,2754.13) v1@3343.44,2786.56 ; v1(3330,2610) v1(3330,2800)
SDA: R12.1 U2.27 U6.4 | length 2818
  Top Layer w12: U2.27@1892.24,2193.46 1892.24,2377.24 1915,2400 2010,2400 2058,2448 2358,2448 2410,2500 v1(2460,2500) ; R12.1@2425,1345 2565,1345 2630,1280 2665,1280 2677.6,1292.6 U6.4@2677.6,1331.61 ; R12.1@2443.44,1331.56 cw(c2475.87,1299.13) 2475.87,1345 cw(c2475.87,1390.87) R12.1@2443.44,1358.44 ; v1@2446.56,2486.56 ccw(c2414.13,2454.13) 2414.13,2500 ccw(c2414.13,2545.87) v1@2446.56,2513.44 ; v1@2491.56,1331.56 ccw(c2459.13,1299.13) 2459.13,1345 ccw(c2459.13,1390.87) v1@2491.56,1358.44 ; v1@2518.44,1331.56 cw(c2550.87,1299.13) 2550.87,1345 cw(c2550.87,1390.87) v1@2518.44,1358.44 ; U6.4@2674.45,1314.21 cw(c2666.84,1306.61) 2677.6,1306.61
  Bottom Layer w12: v1@2446.56,2486.56 cw(c2377.92,2417.92) 2475,2417.92 ; v1@2455.05,2495.05 cw(c2406.89,2446.89) 2475,2446.89 ; v1(2460,2500) 2475,2485 2475,2255 ; v1@2463.54,2503.54 cw(c2435.86,2475.86) 2475,2475.86
  Bottom Layer w15: 2475,2255 2475,1515 2460,1500 2460,1425 2505,1380 ; v1@2494.5,1359 ccw(c2478.75,1380) 2505,1380 ; v1(2505,1345) 2505,1380 ; v1@2515.5,1359 cw(c2531.25,1380) 2505,1380
SDI: U2.14 U5.14 | length 3498.8
  Top Layer w12: U2.14@1892.24,1876.54 1892.24,1812.76 1925,1780 v1(1925,1770) ; 1906.93,1798.07 cw(c1880.14,1771.29) v1@1918,1770.2 ; 1909.64,1795.36 ccw(c1925,1810.73) v1@1925,1789 ; v1(2190,2290) 2233.89,2290 ; v1@2203.85,2277 cw(c2233.89,2248.82) 2233.89,2290 ; v1@2203.85,2303 ccw(c2233.89,2331.18) 2233.89,2290 ; U5.14@3225,2955 3345,2955 ; U5.14@3257.24,2950.76 cw(c3267.49,2940.51) 3267.49,2955 cw(c3267.49,2969.49) U5.14@3257.24,2959.24 ; 3270.85,2955 cw(c3270.85,2840.85) v1@3351.56,2921.56 ; 3292.92,2535 ccw(c3292.92,2632.08) v1@3361.56,2563.44 ; 3299.82,2955 cw(c3299.82,2869.82) v1@3360.05,2930.05 ; 3321.89,2535 ccw(c3321.89,2603.11) v1@3370.05,2554.95 ; 3328.79,2955 cw(c3328.79,2898.79) v1@3368.54,2938.54 ; v1@3347.48,2942.36 ccw(c3336.83,2946.83) 3345,2955 ; 3350.86,2535 ccw(c3350.86,2574.14) v1@3378.54,2546.46 ; v1@3357.64,2952.52 cw(c3353.17,2963.17) 3345,2955 ; v1(3365,2935) 3345,2955 ; v1(3375,2550) 3360,2535 2760,2535 2580,2355 2298.89,2355 2233.89,2290
  Bottom Layer w12: v1@1911.56,1783.44 ccw(c1879.13,1815.87) 1925,1815.87 ccw(c1970.87,1815.87) v1@1938.44,1783.44 ; v1(1925,1770) 1925,1840 1960,1875 1960,2185 2010,2235 2070,2235 2125,2290 v1(2190,2290) ; v1@2176.56,2276.56 ccw(c2144.13,2244.13) 2144.13,2290 ccw(c2144.13,2335.87) v1@2176.56,2303.44 ; v1@3351.56,2921.56 cw(c3294.99,2864.99) 3375,2864.99 ; v1@3360.05,2930.05 cw(c3323.96,2893.96) 3375,2893.96 ; v1@3361.56,2563.44 ccw(c3329.13,2595.87) 3375,2595.87 ccw(c3420.87,2595.87) v1@3388.44,2563.44 ; v1(3365,2935) 3375,2925 v1(3375,2550)
T485A+: J2.1 R8.1 | length 1020.5
  Top Layer w30: J2.1@415,2300 690,2300 730,2260 R8.1@900,2260 ; J2.1@452.78,2262.22 cw(c543.98,2171.02) 543.98,2300 cw(c543.98,2428.98) J2.1@452.78,2337.78 ; J2.1@473.99,2241.01 cw(c616.41,2098.59) 616.41,2300 cw(c616.41,2501.41) J2.1@473.99,2358.99
T485B-: J2.2 R7.1 | length 808
  Top Layer w30: J2.2@380.94,1982.46 ccw(c357.44,2035) 415,2035 ; J2.2@415,1906.3 415,2035 ; J2.2@449.06,1982.46 cw(c472.56,2035) 415,2035 ; R7.1@900,2145 525,2145 415,2035
  Top Layer w100: J2.2@420,1906.3 J2.2@436.3,1906.3
TEST_F1: J5.1 U2.1 | length 4301.9
  Top Layer w12: v1@1576.46,1201.46 ccw(c1604.14,1229.14) 1604.14,1190 ; v1(1580,1205) 1595,1190 2510,1190 2545,1155 2875,1155 2905,1125 3415,1125 ; v1@1584.95,1209.95 ccw(c1633.11,1258.11) 1633.11,1190 ; v1@1593.44,1218.44 ccw(c1662.08,1287.08) 1662.08,1190 ; J5.1@3440.41,1032.71 ccw(c3346.51,1056.5) 3415,1125 ; J5.1@3452.04,1029.76 ccw(c3370.33,1050.46) 3429.93,1110.07 ccw(c3489.54,1169.67) J5.1@3510.24,1087.96 ; J5.1@3463.67,1026.81 ccw(c3394.16,1044.43) 3444.87,1095.13 ccw(c3495.57,1145.84) J5.1@3513.19,1076.33 ; J5.1@3475.3,1023.86 ccw(c3417.98,1038.39) 3459.8,1080.2 ccw(c3501.61,1122.02) J5.1@3516.14,1064.7 ; J5.1@3507.29,1099.59 cw(c3483.5,1193.49) 3415,1125 ; J5.1@3530,1010 3415,1125
  Top Layer w15: 1635,2167.28 cw(c1661.83,2167.28) v1@1654.67,2193.13 ; 1635,2187 cw(c1656.37,2187) v1@1650.67,2207.59 ; v1(1650,2210) 1635,2195 1635,2170 1659.76,2145.24 U2.1@1686.54,2145.24 ; 1651.45,2153.55 ccw(c1665.87,2167.97) U2.1@1665.87,2147.58
  Bottom Layer w12: v1@1566.56,1218.44 ccw(c1534.13,1250.87) 1580,1250.87 ccw(c1625.87,1250.87) v1@1593.44,1218.44 ; v1(1580,1205) 1580,1850 1665,1935 1665,2195 v1(1650,2210) ; v1@1636.56,2196.56 cw(c1567.92,2127.92) 1665,2127.92 ; v1@1645.05,2205.05 cw(c1596.89,2156.89) 1665,2156.89 ; v1@1653.54,2213.54 cw(c1625.86,2185.86) 1665,2185.86
TEST_F2: J5.2 U2.2 | length 4836.4
  Top Layer w12: v1(1525,1255) 1530,1250 1610,1250 1635,1225 2520,1225 2560,1185 2885,1185 2915,1155 3281.3,1155 J5.2@3530,1403.7 ; v1@1529.95,1259.95 ccw(c1553.97,1283.97) 1553.97,1250 ; v1@1538.44,1241.56 cw(c1558.8,1221.2) 1558.8,1250 ; v1@1538.44,1268.44 ccw(c1582.94,1312.94) 1582.94,1250 ; J5.2@3437.57,1403.7 cw(c3214.44,1403.7) 3372.22,1245.92 cw(c3530,1088.14) J5.2@3530,1311.28 ; J5.2@3449.57,1403.7 cw(c3255.41,1403.7) 3392.71,1266.41 cw(c3530,1129.11) J5.2@3530,1323.28 ; J5.2@3461.57,1403.7 cw(c3296.38,1403.7) 3413.19,1286.89 cw(c3530,1170.08) J5.2@3530,1335.28 ; J5.2@3473.57,1403.7 cw(c3337.35,1403.7) 3433.68,1307.38 cw(c3530,1211.05) J5.2@3530,1347.28 ; J5.2@3485.57,1403.7 cw(c3378.32,1403.7) 3454.16,1327.86 cw(c3530,1252.02) J5.2@3530,1359.28
  Top Layer w15: v1(1613.74,2113.74) U2.2@1686.54,2113.74 ; v1@1626.11,2101.37 cw(c1655.99,2071.49) 1655.99,2113.74 cw(c1655.99,2155.99) v1@1626.11,2126.11
  Bottom Layer w12: v1@1511.56,1268.44 ccw(c1479.13,1300.87) 1525,1300.87 ccw(c1570.87,1300.87) v1@1538.44,1268.44 ; v1(1525,1255) 1525,1320 1545,1340 1545,1865 1630,1950 1630,2097.48 v1(1613.74,2113.74) ; v1@1600.3,2100.3 cw(c1528.61,2028.61) 1630,2028.61 ; v1@1608.79,2108.79 cw(c1557.59,2057.59) 1630,2057.59 ; v1@1617.28,2117.28 cw(c1586.56,2086.56) 1630,2086.56
TXD: J4.2 U2.31 U16.4 | length 2727.5
  Top Layer w15: 1490,2200.69 ccw(c1507.69,2200.69) U16.4@1495.18,2188.18 ; U16.4@1495.08,2188.28 cw(c1506.06,2200) 1490,2200 ; U16.4@1520,2185 1505,2185 1490,2200 ; v1@1777.51,2095.49 ccw(c1739.08,2096.55) 1766.26,2123.74 ; v1@1794.51,2112.49 cw(c1793.45,2150.92) 1766.26,2123.74 ; v1(1795,2095) 1766.26,2123.74 ; 1490,2200 1490,2235 1545,2290 1740,2290 1766.26,2263.74 1766.26,2123.74
  Bottom Layer w15: J4.2@660,2800 1675,2800 1770,2705 1770,2560 1815,2515 1815,2115 ; J4.2@675.58,2784.42 cw(c713.18,2746.82) 713.18,2800 cw(c713.18,2853.18) J4.2@675.58,2815.58 ; v1@1782.63,2107.37 ccw(c1704.47,2185.53) 1815,2185.53 ; v1@1793.23,2096.77 ccw(c1740.68,2149.32) 1815,2149.32 ; v1(1795,2095) 1815,2115 ; v1@1800.55,2111.6 ccw(c1805.03,2124.97) 1815,2115 ; v1@1803.84,2086.16 ccw(c1776.89,2113.11) 1815,2113.11 ; v1@1811.6,2100.55 cw(c1824.97,2105.03) 1815,2115
VCC: C8.2 C11.2 C12.2 C14.2 C15.1 C18.2 J4.4 JP1.2 L1.2 R1.2 R2.2 R3.2 R4.2 R5.2 R9.1 R10.2 R11.2 R12.2 R28.2 R31.2 U1.6 U2.4 U2.6 U3.5 U3.6 U5.10 U5.16 U6.5 U16.8 | length 13523.3
  Top Layer w12: v1(3120,2755) U5.10@3225,2755 ; v1@3133.44,2741.56 cw(c3165.87,2709.13) 3165.87,2755 cw(c3165.87,2800.87) v1@3133.44,2768.44 ; U5.10@3192.76,2750.76 ccw(c3182.51,2740.51) 3182.51,2755 ccw(c3182.51,2769.49) U5.10@3192.76,2759.24 ; U5.16@3225,3055 3305,3055 3400,2960 3665,2960 3705,2920 JP1.2@3705,2895 ; U5.16@3257.24,3050.76 cw(c3267.49,3040.51) 3267.49,3055 cw(c3267.49,3069.49) U5.16@3257.24,3059.24 ; 3670.78,2954.22 cw(c3618.81,2902.25) JP1.2@3692.05,2896.09 ; 3689.05,2935.95 cw(c3652.52,2899.42) JP1.2@3704,2895.08
  Top Layer w15: U6.5@2715,1331.61 2715,1240 2720,1235
  Top Layer w20: R1.2@990,2030 1060,2030 1090,2000 1090,1730 1120,1700 1355,1700 1415,1760 C11.2@1415,1815 ; R1.2@1005.61,2019.39 cw(c1031.21,1993.79) 1031.21,2030 cw(c1031.21,2066.21) R1.2@1005.61,2040.61 ; U16.8@1300,2035 U16.8@1310,2025 ; C11.2@1404.39,1804.39 cw(c1378.79,1778.79) 1415,1778.79 cw(c1451.21,1778.79) C11.2@1425.61,1804.39 ; U2.6@1686.54,1987.76 1642.24,1987.76 1625,2005 1625,2035 1640.75,2050.75 U2.4@1686.54,2050.75 ; L1.2@2425,2077 2558,2077 2640,1995 2870,1995 v1(2885,2010) 3045,2010 3065,2030 R2.2@3065,2077 ; L1.2@2440.61,2066.39 cw(c2466.21,2040.79) 2466.21,2077 cw(c2466.21,2113.21) L1.2@2440.61,2087.61 ; 2812.57,1995 ccw(c2812.57,2082.43) v1@2874.39,2020.61 ; U1.6@2825,1735 2880,1735 2900,1715 2900,1625 2936,1589 ; 2860.86,1995 ccw(c2860.86,2034.14) v1@2888.54,2006.46 ; v1@2874.39,1630.61 ccw(c2812.57,1692.43) 2900,1692.43 ; v1(2885,1335) C12.2@2975,1335 ; v1@2885,1605 cw(c2885,1568.79) 2910.61,1594.39 cw(c2936.21,1620) v1@2900,1620 ; v1(2885,1620) 2916,1589 C8.2@2975,1589 ; v1@2885,1625 cw(c2885,1588.79) 2910.61,1614.39 ; v1@2888.54,1616.46 ccw(c2860.86,1644.14) 2900,1644.14 ; v1@2895.61,1324.39 cw(c2921.21,1298.79) 2921.21,1335 cw(c2921.21,1371.21) v1@2895.61,1345.61 ; v1@2895.61,1999.39 cw(c2921.21,1973.79) 2921.21,2010 cw(c2921.21,2046.21) v1@2895.61,2020.61 ; 2917,1608 ccw(c2943.67,1634.67) C8.2@2962.51,1601.99 ; 2935.44,1589.56 ccw(c2957.16,1611.27) C8.2@2972.5,1584.67 ; C12.2@2959.39,1324.39 ccw(c2933.79,1298.79) 2933.79,1335 ccw(c2933.79,1371.21) C12.2@2959.39,1345.61 ; C8.2@2959.39,1578.39 ccw(c2933.79,1552.79) 2933.79,1589 ccw(c2933.79,1625.21) C8.2@2959.39,1599.61 ; R2.2@3054.39,2066.39 cw(c3028.79,2040.79) 3065,2040.79 cw(c3101.21,2040.79) R2.2@3075.61,2066.39
  Top Layer w30: J4.4@660,3000 780,3000 ; J4.4@670.27,2989.73 cw(c695.07,2964.93) 695.07,3000 cw(c695.07,3035.07) J4.4@670.27,3010.27 ; 779.64,3089.64 cw(c865,3004.29) R9.1@865,3125 ; 780,2795 800,2815 920,2815 955,2850 R3.2@955,2875 ; 805,3115 cw(c841.02,3078.99) R9.1@861.06,3125.81 ; 830.86,3140.86 cw(c865,3106.72) R9.1@865,3155 ; R9.1@870,3135 825,3135 780,3090 780,2575 795,2560 955,2560 ; 935,2830 ccw(c910.65,2854.35) R3.2@941.14,2870.35 ; R4.2@955,2625 955,2560 ; 985.94,2529.06 cw(c951.98,2495.11) C14.2@1000,2494.92 ; U16.8@1300,2035 1355,2035 ; R5.2@1300,2315.28 ccw(c1359.02,2314.45) 1317.28,2272.72 ; U16.8@1310,2025 1315,2020 1315,1895 1330,1880 1390,1880 1415,1855 C11.2@1415,1815 1565,1815 ; 1315,1898.79 cw(c1356.21,1898.79) R31.2@1327.07,1927.93 ; 1315,2010.86 cw(c1352.14,2010.86) U16.8@1325.88,2037.12 ; 1315,2015.15 cw(c1342.7,2015.15) U16.8@1326.21,2037.41 ; 1315,2278.79 cw(c1356.21,2278.79) R5.2@1327.07,2307.93 ; U16.8@1326.27,2032.55 ccw(c1339.18,2050.82) 1355,2035 ; U16.8@1328,2032 ccw(c1328,2089.94) 1368.97,2048.97 ; R5.2@1330,2314.86 ccw(c1458.05,2313.06) 1367.5,2222.5 ; 1414.13,1855.87 cw(c1375.62,1817.36) C11.2@1429.95,1813.63 ; 1625,2005 1565,1945 1565,1390 1680,1275 2545,1275 2585,1235 2785,1235 v1(2885,1335) ; 2026.72,1275 ccw(c2026.72,1333.28) C18.2@2067.93,1292.07 ; C18.2@2082.07,1292.07 ccw(c2123.28,1333.28) 2123.28,1275 ; R11.2@2335,1467 2335,1300 2360,1275 ; C15.1@2440.5,731.15 cw(c2487.65,743.67) 2453.16,778.16 ; C15.1@2444.39,745.61 ccw(c2418.79,771.21) 2455,771.21 ccw(c2491.21,771.21) 2465.61,745.61 ccw(c2491.21,771.21) 2491.21,735 ccw(c2491.21,698.79) C15.1@2465.61,724.39 ; 2445.1,890 ccw(c2445.1,916.9) U3.6@2464.12,897.88 ; C15.1@2469.5,738.85 cw(c2545.87,759.12) 2490,815 ; U3.6@2490,890 2435,890 2415,910 2415,1040 2445,1070 2880,1070 v1(2885,1065) ; U3.6@2490,900 2490,815 ; 2585,1070 2620,1035 R28.2@2620,970 ; R10.2@2620,735 C15.1@2455,735 2455,780 2490,815 ; 2848.79,1070 cw(c2848.79,1028.79) v1@2877.93,1057.93 ; v1(3110,3125) 3180,3055 U5.16@3225,3055 ; 3173.1,3061.9 ccw(c3197,3085.8) U5.16@3197,3052 ; 955,2560 985,2530 C14.2@985,2495 1060,2495 1240,2315 R5.2@1315,2315 1315,2275 1390,2200 1390,2070 1355,2035
  Bottom Layer w20: v1@2885,2000 v1(2885,2010)
  Bottom Layer w30: v1(2885,1065) 2885,2000 2920,2035 2920,2270 2975,2325 2975,2585 3110,2720 v1(3110,3125) ; v1@2885,2020 ccw(c2885,2068.28) 2919.14,2034.14 ; 3085.25,2695.25 ccw(c3025.5,2755) v1@3110,2755 ; 3110,2718.6 cw(c3143.12,2718.6) v1@3125.36,2746.56 ; 3110,2803.28 ccw(c3168.28,2803.28) v1@3127.07,2762.07
VIN+: C9.1 D4.1 J1.1 J3.1 | length 8540.1
  Top Layer w20: C9.1@2964.39,1721.61 ccw(c2938.79,1747.21) 2975,1747.21 ccw(c3011.21,1747.21) C9.1@2985.61,1721.61 ; C9.1@2975,1711 2975,1755 2990,1770 3160,1770 3195,1805 J3.1@3530,1805
  Top Layer w60: J1.1@365.52,1457.74 ccw(c255.01,1352.17) 255.01,1505 ; J1.1@365.52,1552.26 cw(c255.01,1657.83) 255.01,1505 ; J1.1@463.38,1456.62 cw(c580.19,1339.81) 580.19,1505 cw(c580.19,1670.19) J1.1@463.38,1553.38 ; D4.1@910,1505 255,1505 ; J3.1@3530,1805 3740,1805 3815,1730 3815,615 3730,530 3500,530 3355,385 3355,220 3245,110 695,110 590,215 590,430 445,575 200,575 105,670 105,1355 255,1505
pads on no net: J6.1 J7.1 J8.1 J9.1 JP1.3 U1.7 U2.9 U3.8 U5.9
copper on no net: | length 693.6
  Top Layer w59.06: 196.85,3346.46 248.31,3295 455,3295 ; 330,255 450,255 ; 3480,245 3620,245 3625,240 ; 3485,3290 3625,3290 3630,3285

## Polygon pours and split planes (outlines as drawn)
GND on Top Layer (solid): 0,0 3935,0 3935,3540 0,3540
GND on Bottom Layer (solid): 0,0 3935,0 3935,3545 0,3545

## Keep-outs
Keep-Out Layer:
  circle w10: c-203.9,3120 r68.9
  lines w10: 0,0 0,3543.31 3937.01,3543.31 3937.01,0 0,0

## Silkscreen, mask and mechanical layers (free items; w line width, h text height)
Top Overlay:
  lines w10: 815,3005 855,3045 ; 820,2770 855,2805 ; 2980,905 3030,855
  text "MOSI" at 3330,2870 h60
  text "VCC" at 3775,2865 h60
  text "RST" at 3375,2665 h60
  text "485" at 245,2600 h78.74
  text "SCK" at 3370,2570 h60
  text "GND" at 3835,2470 h60 r90
  text "MISO" at 3315,2465 h60
  text "A+ B-" at 660,2390 h118.11 r270
  text "-" at 3260,2155 h118.11 r90
  text "+" at 3270,1700 h118.11 r90
  text "+24VGND" at 685,1695 h118.11 r270
  text "F2" at 3250,1345 h78.74 r90
  text "F1" at 3250,965 h78.74 r90
  text "XIAN" at 2010,285 h78.74
  text "BOSSUN" at 2010,170 h78.74
  text "20121017" at 2010,65 h78.74
Bottom Overlay:
  lines w10: -98.54,3346.46 196.85,3346.46 196.85,3723.15 ; 1170,3115 1170,3645 ; 2635,2555 4090,2555 ; 2725,3185 4100,3185 ; 2765,3165 2765,3665

## Dimensions
0,3543.31 to 196.85,3723.15 on Keep-Out Layer
-98.54,3346.46 to 0,3543.31 on Keep-Out Layer
-203.9,3188.9 to -203.9,3051.1 on Keep-Out Layer
0,0 to 3937.01,0 on Keep-Out Layer
0,0 to 0,3543.31 on Keep-Out Layer
4100,3185 to 4045,3543.31 on Keep-Out Layer
4100,3185 to 4090,2555 on Keep-Out Layer
1170,3645 to 2765,3665 on Keep-Out Layer
2765,3665 to 3937.01,3543.31 on Keep-Out Layer
1170,3645 to 0,3543.31 on Keep-Out Layer

## Text inside footprints (layer, text, board x,y; h text height)
LED5: Bottom Overlay "DP" at 2485,2595 h39.37; Bottom Overlay "F" at 2745,2935 h39.37; Bottom Overlay "G" at 2585,2895 h39.37; Bottom Overlay "E" at 2745,2755 h39.37; Bottom Overlay "D" at 2585,2595 h39.37; Bottom Overlay "C" at 2425,2755 h39.37; Bottom Overlay "B" at 2425,2955 h39.37; Bottom Overlay "A" at 2585,3095 h39.37